# Altium PCB PERfECT-PRO2.PcbDoc
Units mm, origin at the board's own origin, x right, y up, seen from the top; angles counter-clockwise.
Board outline 152.4 x 101.6 mm, 2 copper layers (Top Layer, Bottom Layer); 36 components, 61 nets, 234 pads, 26 vias.
Unrouted connection lines stored in the file: 20.
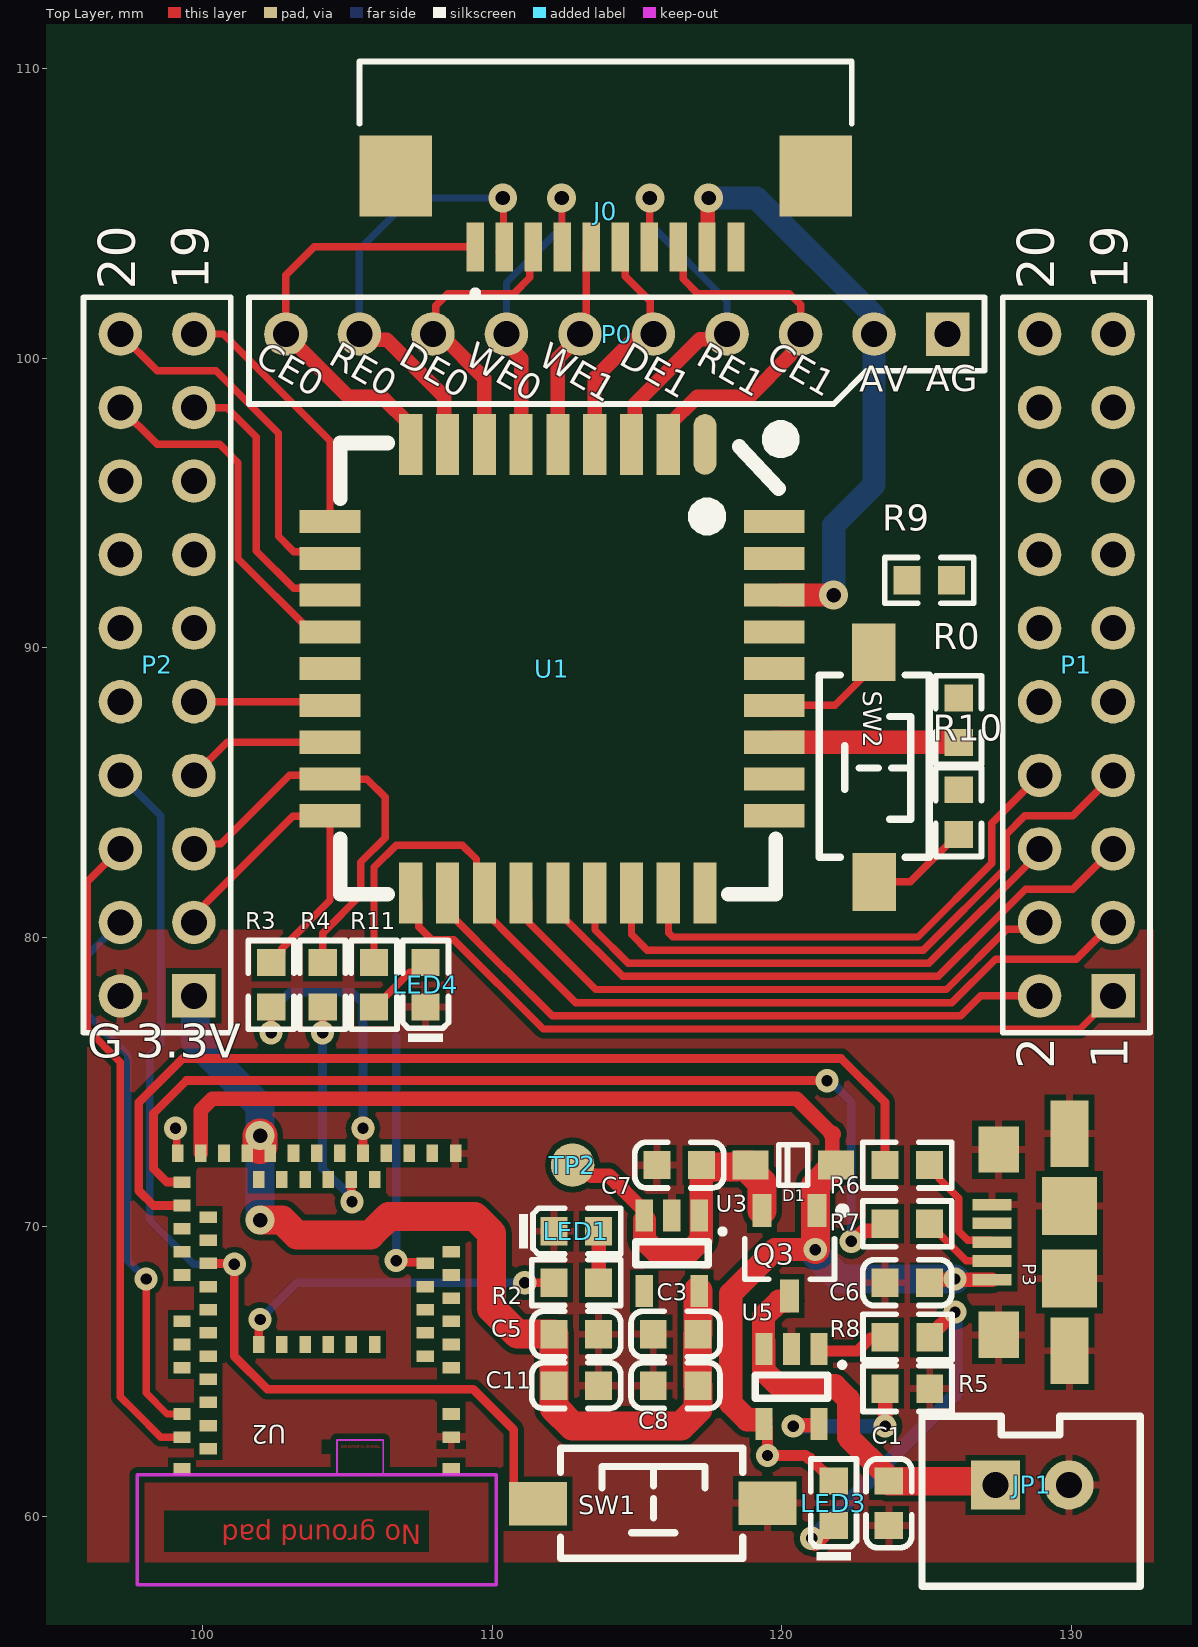
[diagram p0: Top Layer view]
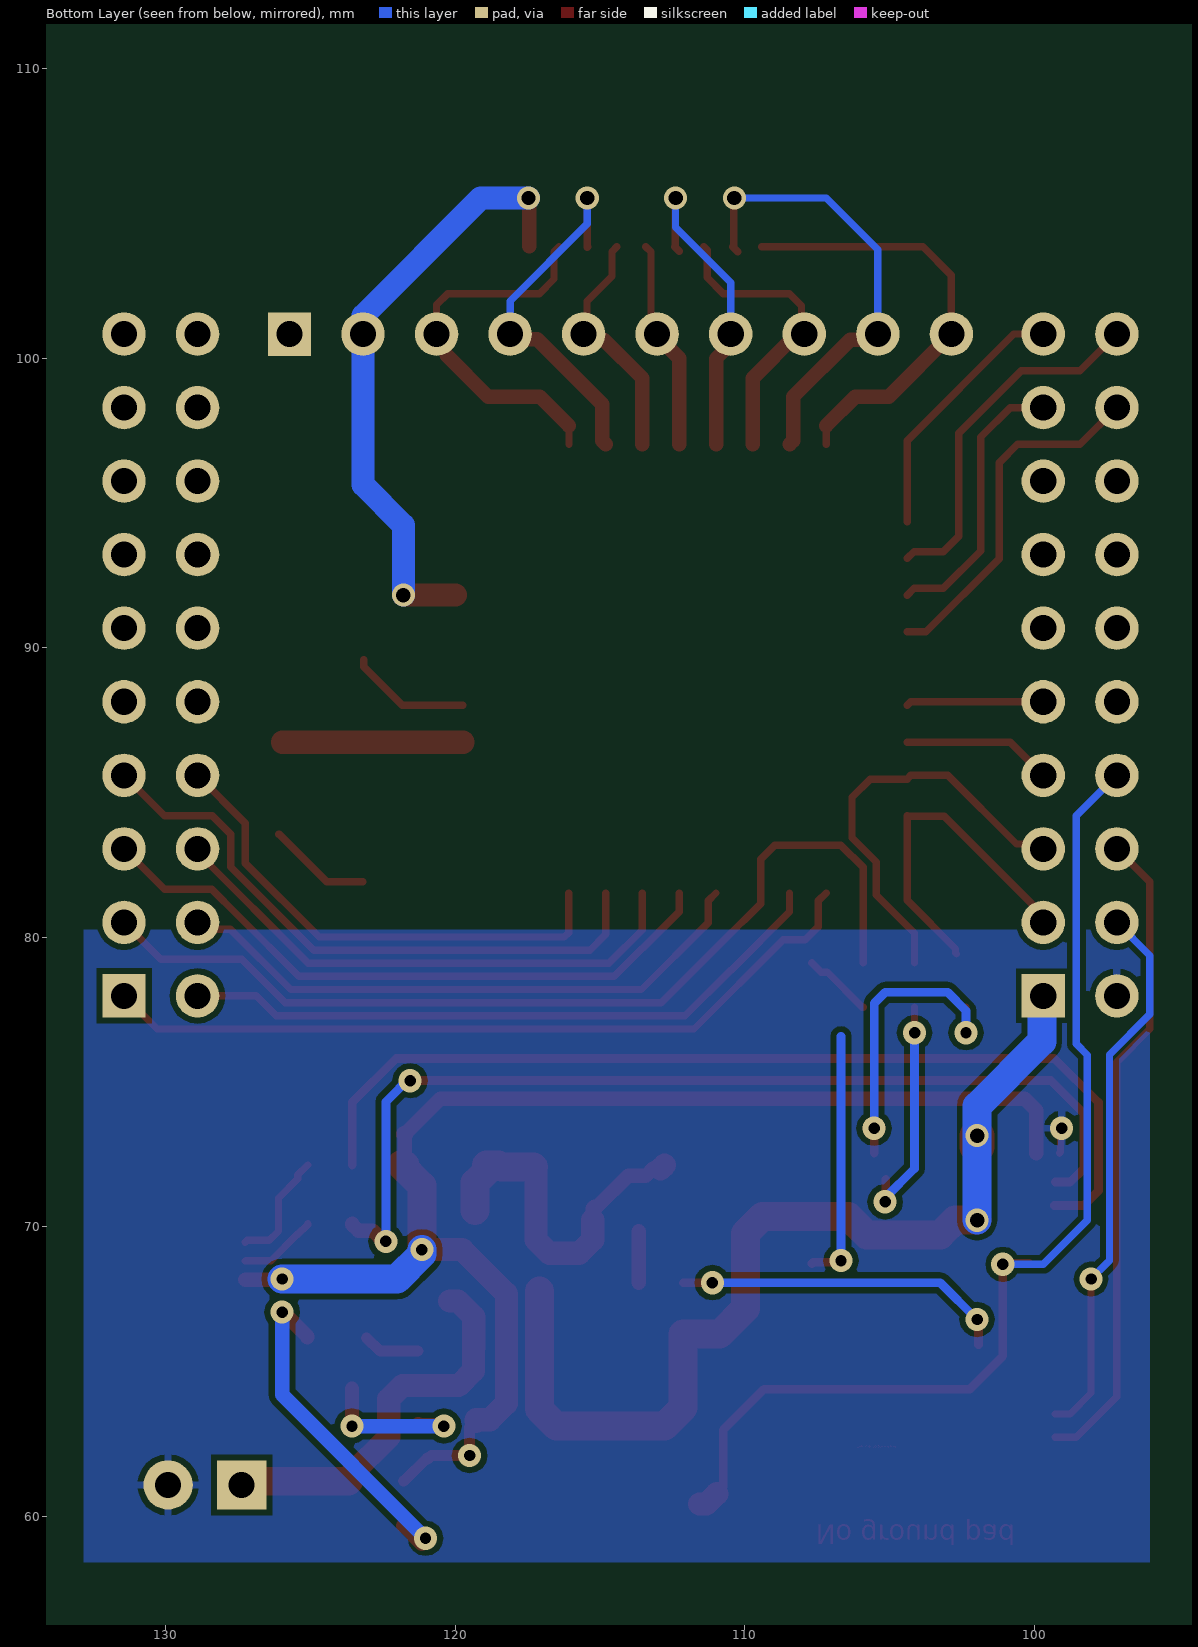
[diagram p1: Bottom Layer view, seen from below]
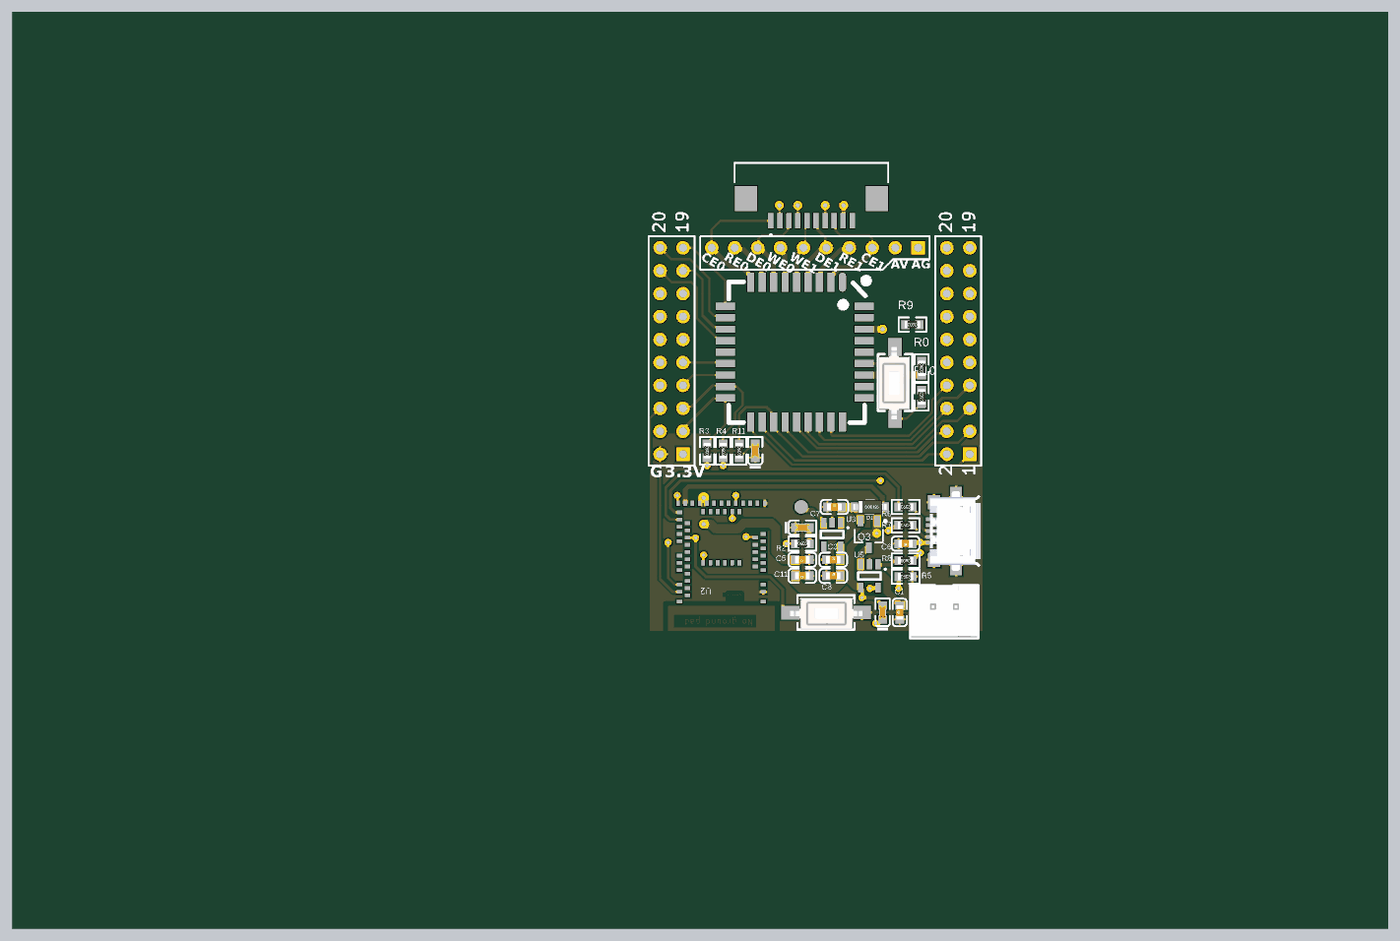
[diagram p2: 3D render of the assembled board from above, using the file's embedded part models]

## Layer stack, top to bottom
Top Solder: solder mask 0.0102, Solder Resist, Dk 3.5
Top Layer: signal copper 0.0356
Dielectric 1: dielectric 0.32, FR-4, Dk 4.8
Bottom Layer: signal copper 0.0356
Bottom Solder: solder mask 0.0102, Solder Resist, Dk 3.5

## Board outline
25.4,25.4 177.8,25.4 177.8,127 25.4,127

## Design rules (kind name [scope] priority, off if disabled: settings)
Clearance Clearance_1 [All] p1: gap=0.2 ignorepadtopadclearanceinfootprint=TRUE
ComponentClearance ComponentClearance_1 [All] p1: gap=0.254 collisioncheckmode=3 verticalgap=0.254 showdistances=FALSE
ComponentClearance [All] p2: gap=0 collisioncheckmode=3 verticalgap=2540 showdistances=TRUE
PolygonConnect [All] p1: connectstyle=Relief reliefconductorwidth=0.254 reliefentries=4 polygonreliefangle="90 Angle" airgapwidth=0.2
RoutingVias [All] p1: holewidth=0.711 width=1.27 viastyle="Through Hole" minholewidth=0.711 minwidth=1.27 maxholewidth=0.711 maxwidth=1.27
SolderMaskExpansion [All] p1: expansion=0.102 istentingtop=FALSE
Width [All] p1: maxlimit=1.2 minlimit=0.254 preferedwidth=0.254
29 further rules are at their usual default settings.

## Components (designator, comment, footprint, x,y, rotation, side; value= is the part's Value field where it differs from the comment)
C1 "10uF" LC-0603_C 123.698,60.452 r90 top
C3 "100nF" LC-0603_C 116.332,66.294 r0 top
C5 "10uF" LC-0603_C 112.903,66.294 r180 top
C6 "10uF" LC-0603_C 124.333,68.072 r180 top
C7 "10uF" LC-0603_C 116.459,72.136 r0 top
C8 "10uF" LC-0603_C 116.332,64.516 r0 top
C11 "100nF" LC-0603_C 112.903,64.516 r180 top
D1 "MBR120" LC-SOD-123 120.396,72.136 r0 top
J0 "FFC3B07-10-T" GCT_FFC3B07-10-T 113.919,106.299 r180 top
JP1 "HDR-1X2" XH2.54-LI-2P 128.651,61.087 r0 top
LED1 "Green" LC-0603_LED_S1 112.903,69.85 r0 top
LED3 "Green" 0603_LED_S1 121.793,60.452 r90 top
LED4 "Green" LC-0603_LED_S1 107.696,78.359 r90 top
P0 "Header 10" HDR1X10 125.73,100.838 r180 top
P1 "JTAG" HDR2X10 131.445,77.978 r90 top
P2 "Header 10X2" HDR2X10 99.695,77.978 r90 top
P3 "Micro USB" 1981584-1 128.599,69.471 r90 top
Q3 "DMG2305" LC-SOT-23-3L 120.269,69.088 r90 top
R0 "0Ω" LC-0603_R 126.111,87.503 r270 top
R2 "1K" LC-0603_R 112.903,68.072 r0 top
R3 "0Ω" 0603_R 102.362,78.359 r270 top
R4 "0Ω" 0603_R 104.14,78.359 r270 top
R5 "4.7K" LC-0603_R 124.341,64.414 r0 top
R6 "22R" LC-0603_R 124.333,72.136 r0 top
R7 "22R" LC-0603_R 124.333,70.104 r0 top
R8 "1K" 0603_R 124.341,66.192 r180 top
R9 "0Ω" LC-0603_R 125.095,92.329 r180 top
R10 "1K" LC-0603_R 126.111,84.328 r90 top
R11 "1K" LC-0603_R 105.918,78.359 r270 top
SW1 "3x6x5" "TSW SMD-3*6*2.5" 115.57,60.452 r0 top
SW2 "3x6x5" "TSW SMD-3*6*2.5" 123.19,85.852 r270 top
TP2 "TESTPOINTROUND1.5MM" TESTPOINT_ROUND_1.5MM 112.776,72.136 r0 top
U1 "PERfECTcoreV5" PERfECTcore36 117.348,97.028 r270 top
U2 "MDBT50" MDBT50 103.935,65.388 r180 top
U3 "AP2112(3.3V)" SOT23-5 116.205,69.088 r270 top
U5 "MCP73831T-2ACI/OT" SOT23-5 120.335,64.486 r270 top

## Footprints (in the part's own frame and the unit in brackets; to place one, negate y for a bottom-side part, rotate by r counter-clockwise, add the part's x,y. Pads: shape width x height; smd on the part's side, far side on the other; paste and mask are expansions set on the pad)
0603_LED_S1 [mm]
  rect 0.93x0.98 smd: A(0.77,0) K(-0.77,0)
  silkscreen extent -1.98,-0.79 1.54,0.79, body extent -0.8,-0.4 0.8,0.4, height 0.6
0603_R [mm]
  rect 0.93x0.98 smd: 1(-0.77,0) 2(0.77,0)
  silkscreen extent -1.53,-0.79 1.54,0.79, body extent -0.85,-0.4 0.85,0.4, height 0.56
1981584-1 [mm]
  rect 0.4x1.35 smd: 1(-1.3,1.338) 2(-0.65,1.338) 3(0,1.338) 4(0.65,1.338) 5(1.3,1.338)
  rect 2.3x1.3 smd: 6(-3.75,-1.337) 6(3.75,-1.337)
  rect 1.6x1.4 smd: 6(-3.2,1.113) 6(3.2,1.113)
  rect 2x1.9 smd: 6(-1.25,-1.337) 6(1.25,-1.337)
  body extent -4.4,-4.05 4.4,1.55, height 2.75
GCT_FFC3B07-10-T [mm]
  rect 0.6x1.7 smd: 1(4.5,2.45) 2(3.5,2.45) 3(2.5,2.45) 4(1.5,2.45) 5(0.5,2.45) 6(-0.5,2.45) 7(-1.5,2.45) 8(-2.5,2.45) 9(-3.5,2.45) 10(-4.5,2.45)
  rect 2.5x2.8 smd: S1(7.25,0) S2(-7.25,0)
  silkscreen extent -8.5,-3.95 8.5,4.15
HDR1X10 [mm] "Connector; Header; 10 Position"
  rect 1.5x1.5 hole 0.9: 1(0,0)
  round 1.5 hole 0.9: 2(2.54,0) 3(5.08,0) 4(7.62,0) 5(10.16,0) 6(12.7,0) 7(15.24,0) 8(17.78,0) 9(20.32,0) 10(22.86,0)
  silkscreen extent -1.27,-1.27 24.13,2.41
HDR2X10 [mm]
  rect 1.5x1.5 hole 0.9: 1(0,0)
  round 1.5 hole 0.9: 2(0,2.54) 3(2.54,0) 4(2.54,2.54) 5(5.08,0) 6(5.08,2.54) 7(7.62,0) 8(7.62,2.54) 9(10.16,0) 10(10.16,2.54) 11(12.7,0) 12(12.7,2.54) 13(15.24,0) 14(15.24,2.54) 15(17.78,0) 16(17.78,2.54) 17(20.32,0) 18(20.32,2.54) 19(22.86,0) 20(22.86,2.54)
  silkscreen extent -1.27,-1.27 24.13,3.81
LC-0603_C [mm]
  rect 0.93x0.98 smd: 1(-0.77,0) 2(0.77,0)
  silkscreen extent -1.53,-0.79 1.54,0.79, body extent -0.8,-0.4 0.8,0.4, height 0.3
LC-0603_LED_S1 [mm]
  rect 0.93x0.98 smd: A(0.77,0) K(-0.77,0)
  silkscreen extent -1.98,-0.79 1.54,0.79, body extent -0.8,-0.4 0.8,0.4, height 0.6
LC-0603_R [mm]
  rect 0.93x0.98 smd: 1(-0.77,0) 2(0.77,0)
  silkscreen extent -1.53,-0.79 1.54,0.79, body extent -0.85,-0.4 0.85,0.4, height 0.56
LC-SOD-123 [mm]
  rect 1.25x1 smd: 1(1.475,0) 2(-1.475,0)
  silkscreen extent -0.5,-0.7 0.5,0.7, body extent -1.85,-0.77 1.85,0.78, height 1.35
LC-SOT-23-3L [mm] "http://www.aosmd.com/res/packaging_information/SOT-23-3L.pdf"
  rect 1.15x0.65 smd: 1(1.475,-0.95) 2(1.475,0.95) 3(-1.475,0)
  silkscreen extent -0.9,-1.95 1.6,1.55, body extent -0.9,-1.55 0.9,1.55, height 1.25
MDBT50 [mil] "MDBT50"
  rect 23.62x15.75 smd: 1(-183.07,147.64) 2(-183.07,104.33) 3(-183.07,72.83) 4(-183.07,9.84) 5(-147.64,-5.91) 6(-183.07,-21.65) 7(-147.64,-37.4) 8(-183.07,-53.15) 9(-147.64,-68.9) 10(-183.07,-84.65) 11(-147.64,-100.39) 12(-183.07,-116.14) 13(-147.64,-131.89) 14(-183.07,-147.64) 34(183.07,-242.13) 35(183.07,-210.63) 36(147.64,-194.88) 37(183.07,-179.13) 38(147.64,-163.39) 39(183.07,-147.64) 40(147.64,-131.89) 41(183.07,-116.14) 42(147.64,-100.39) 43(147.64,-68.9) 44(183.07,-53.15) 45(147.64,-37.4) 46(183.07,-21.65) 47(147.64,-5.91) 48(183.07,9.84) 49(147.64,25.59) 50(147.64,57.09) 51(183.07,72.83) 52(147.64,88.58) 53(183.07,104.33) 54(147.64,120.08) 55(183.07,147.64)
  rect 15.75x23.62 smd: 15(-188.98,-281.5) 16(-157.48,-281.5) 17(-125.98,-281.5) 18(-94.49,-281.5) 19(-78.74,-246.06) 20(-62.99,-281.5) 21(-47.24,-246.06) 22(-31.5,-281.5) 23(-15.75,-246.06) 24(0,-281.5) 25(15.75,-246.06) 26(31.5,-281.5) 27(47.24,-246.06) 28(62.99,-281.5) 29(78.74,-246.06) 30(94.49,-281.5) 31(125.98,-281.5) 32(157.48,-281.5) 33(188.98,-281.5) 56(-78.74,-21.65) 57(-47.24,-21.65) 58(-15.75,-21.65) 59(15.75,-21.65) 60(47.24,-21.65) 61(78.74,-21.65)
  Top Layer keep-out lines w2.36: -27.56,155.51 -27.56,108.27 -90.55,108.27 -90.55,155.51
  Top Layer keep-out lines w5: 244.09,305.12 244.09,155.51 -27.56,155.51 -90.55,155.51 -244.09,155.51 -244.09,305.12 244.09,305.12
  body extent -247,-293 247,308, height 150
PERfECTcore36 [mm]
  oval 2.1x0.8 smd: 1(0,0)
  rect 2.1x0.8 smd: 2(0,-1.27) 3(0,-2.54) 4(0,-3.81) 5(0,-5.08) 6(0,-6.35) 7(0,-7.62) 8(0,-8.89) 9(0,-10.16) 19(15.494,-10.16) 20(15.494,-8.89) 21(15.494,-7.62) 22(15.494,-6.35) 23(15.494,-5.08) 24(15.494,-3.81) 25(15.494,-2.54) 26(15.494,-1.27) 27(15.494,0)
  rect 0.8x2.1 smd: 10(2.667,-12.954) 11(3.937,-12.954) 12(5.207,-12.954) 13(6.477,-12.954) 14(7.747,-12.954) 15(9.017,-12.954) 16(10.287,-12.954) 17(11.557,-12.954) 18(12.827,-12.954) 28(12.827,2.391) 29(11.557,2.391) 30(10.287,2.391) 31(9.017,2.391) 32(7.747,2.391) 33(6.477,2.391) 34(5.207,2.391) 35(3.937,2.391) 36(2.667,2.391)
  silkscreen extent -0.82,-12.6 15.54,3.26, body extent 0.13,-12.68 15.13,2.32, height 0.51
SOT23-5 [mm]
  rect 1.1x0.6 smd: 1(-1.3,0.95) 2(-1.3,0) 3(-1.3,-0.95) 4(1.3,-0.95) 5(1.3,0.95)
  silkscreen extent -0.8,-1.25 0.4,1.8, body extent -0.6,-1.15 0.6,1.25, height 0.95
TESTPOINT_ROUND_1.5MM [mm] "TESTPOINT_ROUND_1.5MM"
  rrect100% 1.5x1.5 smd paste+0: P$1(0,0)
  body extent -0.76,-0.76 0.76,0.76, height 1.27
"TSW SMD-3*6*2.5" [mm] "3*6*2.5mm"
  rect 2x1.5 smd: 1(-3.996,-0.02) 2(3.937,0)
  silkscreen extent -3.21,-1.9 3.09,1.9, body extent -4,-1.88 4,1.62, height 2.59
XH2.54-LI-2P [mm] "接插件，2P"
  rect 1.7x1.7 hole 0.9: 1(-1.27,0)
  round 1.7 hole 0.9: 2(1.27,0)
  silkscreen extent -3.81,-3.51 3.74,2.37, body extent -3.77,-3.3 3.77,2.4, height 7.05

## Part data
C1 C3 C5 C6 C7 C8 C11: library part C, "无极性贴片电容", BOM名称=无极性贴片电容, 学习资源=www.ooocke.com, 版权归属=源创客
D1: library part DIODE-SCHOTTKYSOD-123, DeviceName=SOD-123, DeviceSetName=DIODE-SCHOTTKY, GateName_1=G$1, LibraryName=microbuilder, SymbolName_1=DIODE-SCHOTTKY
J0: "10 Position FFC, FPC Connector Contacts, Bottom 0.039 (1.00mm) Surface Mount, Right Angle", Package=Package, Availability=Warning, BuyPart=https://www.snapeda.com/parts/FFC3B07-10-T/Global%20Connector%20Technology/view-part/4223038/?ref=eda, DigiKey-Purchase-URL=https://snapeda.com/shop?store=DigiKey&id=4223038, MF="Global Connector Technology", MP=FFC3B07-10-T, Price=None, SnapEDA_Link=https://www.snapeda.com/parts/FFC3B07-10-T/Global%20Connector%20Technology/view-part/4223038/?ref=snap
JP1: library part "Header 2", "2P接插件", BOM名称=2P接插件, 学习资源=www.ooocke.com, 版权归属=源创客
LED1 LED3 LED4: library part LED-SMD, "贴片LED", BOM名称=贴片LED, 学习资源=www.ooocke.com, 版权归属=源创客
P0: "Header, 10-Pin", LatestRevisionDate=17-Jul-2002, LatestRevisionNote="Re-released for DXP Platform.", Publisher="Altium Limited"
P1: library part "Header 10X2", "Header, 10-Pin, Dual row", LatestRevisionDate=17-Jul-2002, LatestRevisionNote="Re-released for DXP Platform.", Publisher="Altium Limited"
P2: "Header, 10-Pin, Dual row", LatestRevisionDate=17-Jul-2002, LatestRevisionNote="Re-released for DXP Platform.", Publisher="Altium Limited"
P3: library part 1981584-1, "CONN RCPT MICRO USB TYPE AB", Manufacturer="REG CON", PartNumber=C21377, Vendor=LCSC
Q3: library part MOSFET-P, "P-Channel Mosfet   LEGEND   VDS: Voltage Drain-Source ID: Drain Current RDS(ON): Drain-Source On-State Resistance VGS(TH): Gate-Source Threshold Voltage CISS: Drain-Source Input Capacitance    SOT-23   Name	VDS	ID	RDS(ON)	VGS(TH)	CISS	Order Number	   IRLML5103	30V	760mA	600 mOhm	--	75pF @ 25V	Digikey: IRLML5103PBFCT-ND	   IRLML6401	12V	4.3A	50 mOhm	950mV @ 250碌A	830pF @ 10V	Digikey: IRLML6401PBFTR-ND	   NTR0202PL	20V	400mA	800 mOhm	2.3V @ 250uA	70pF @ 5V	Digikey: NTR0202PLT1GOSTR-ND	   NTR4101PT1G	20V	1.8A	85 mOhm	1.2V @ 250uA	675pF @ 10V	Digikey: NTR4101PT1GOSCT-ND	   DMP2004K	20V	600mA	900 mOhm	1V @ 250uA	175pF @ 16V	Digikey: DMP2004KDICT-ND	   PMV65XP	20V	3.9A	76 mOhm	950mV @ 1mA	725pF @ 20V	Digikey: 568-2358-2-ND	   							   							TO-252   Name	VDS	ID	RDS(ON)	VGS(TH)	CISS	Order Number	   AOD417	30V	25A	34 mOhm	3V @ 250碌A	920pF @ 15V	Digikey: 785-1106-2-ND	PowerPak   Name	VDS	ID	RDS(ON)	VGS(TH)	CISS	Order Number	   AON7401	30V	12A	14 mOhm	3V @ 250碌A	2600pF @ 15V	Digikey: 785-1302-1-ND", D=D, DeviceSetName=MOSFET-P, G=G, GateName_1=G$1, LibraryName=microbuilder, S=S, SymbolName_1=MOSFET-P
R0 R2 R3 R4 R5 R6 R7 R8 R9 R10 R11: library part R, "贴片电阻", BOM名称=贴片电阻, 学习资源=www.ooocke.com, 版权归属=源创客
SW1 SW2: library part "TSW 3x6", "3x6轻触开关", BOM名称=3x6轻触开关, 学习资源=www.ooocke.com, 版权归属=源创客
TP2: "Test Point   Various test points for characterisation and PCB testing    TESTPOINT_SMT - Compact Surface Mount Test Point [Digikey: 5016KTR-ND]", DeviceName=ROUND1.5MM, DeviceSetName=TESTPOINT, GateName_1=G$1, LibraryName=microbuilder, SymbolName_1=TESTPOINT
U1: "This is the 5th version of PERfEC core.https://github.com/WISE-PERfECT/PERfECT"
U2: "Raytac Corporation   MDBT50  Bluetooth Low Energy Module based on Noridc nRF52840    Source:  Raytac datasheet", DeviceSetName=MDBT50, GateName_1=G$1, HS=HS, LibraryName=microbuilder, LS=LS, QSPI=QSPI, QSPI/SCK=QSPI/SCK, SymbolName_1=MDBT50
U3: library part VREG_SOT23-5, "SOT23-5 Fixed Voltage Regulators      Part	Current Out	V Out	V In	V Dropout	胃JA (掳C/W)	TJ (掳C)	Digikey Part No.	     ADP121	  150mA	  3.3V	  3.4-5.5V	  0.09V @ 150mA	  --	  --	  ADP121-AUJZ33R7CT-ND	     ADP121	  150mA	  3.0V	  3.1-5.5V	  0.09V @ 150mA	  --	  --	  ADP121-AUJZ30R7CT-ND	     ADP122	  300mA	  3.3V	  3.4-5.5V	  0.085V @ 300mA	  --	  --	  ADP122AUJZ-3.3-R7CT-ND	     ADP1712	  300mA	  3.3V	  3.5-5.5V	  0.17V @ 300mA	  --	  --	  ADP1712AUJZ-3.3-R7TR-ND	     AP7311 (Low Cost)	  150mA	  3.3V	  3.5-6V	  0.15V @ 150mA	  --	  --	  AP7311-33WG-7DICT-ND	     LD39015M18R	  150mA	  1.8V	  1.9V-5.5V	  0.08V @ 100mA	  --	  --	  497-6977-1-ND	     LP2985A-33DBVR	  150mA	  3.3V	  3.3-16V	  0.28V @ 150mA	  206	  150	  296-18479-1-ND	     MCP1824T-3302E/OT	  300mA	  3.3V	  3.5V-6V	  0.2V @ 300mA	  --	  --	  MCP1824T-3302E/OTCT-ND	     MIC5205-2.5YM5 TR	  150mA	  2.5V	  2.7-16V	  0.165V @ 150mA	  --	  --	  576-1257-2-ND	     MIC5205-3.0YM5 TR	  150mA	  3.0V	  3.2V-16V	  0.165V @ 150mA	  --	  --	  576-1258-2-ND	     MIC5205-3.3YM5 TR	  150mA	  3.3V	  3.5V-16V	  0.165V @ 150mA	  --	  --	  576-1259-2-ND	     TPS780330220	  150mA	  3.3V+2.2V	  3.6-5.5V	  250mV Max	  --	  --	  296-23332-1-ND	     TDA3663/N1,135	  100mA	  3.3V	  3.5-45V	  0.18V @ 50mA	  --	  --	  568-5343-1-ND	     	  	  	  	  	  	  	  	     	  	  	  	  	  	  	  	   Max operating temp can be calculated using 胃JA, TJ (max junction temperature), and power in watts.  Set the \"Maximum Ambient Temperature\" until it reaches TJ (\"Max Junction Temperature\"), which is the absolute limit for safe use of the regulator: Heat Sink Temperature Calculator   For example, With 12V source into a 3.3V LP2985 and a 30mA load, we are dissipating (12V-3.3V) * 0.03A = 0.261W.  With a 胃JA of 206 掳C/W, a TJ of 150掳C, and 261mW we can safely use the chip without a heat sink up to 75掳C (=147.1掳C Junction Temperature).", DeviceSetName=VREG_SOT23-5, GateName_1=G$1, LibraryName=microbuilder, SymbolName_1=VREG_SOT23-5
U5: library part MCP73831/2, "MCP73831/2 LIPO Charger    VDD: 3.75 - 6V  Temp -40 - 85掳C  Programmable Charge Rate: 15-500mA       NOTE: STAT is a tri-state logic output on the MCP73831 and an open-drain output on the MCP73832.   SOT23-5 with 4.2V output and tri-state logic on STAT = MCP73831T-2ACI/OT", Temp=Temp:, 3.75-6V=3.75-6V, -40-85掳C=-40-85掳C, DeviceSetName=MCP73831/2, GateName_1=G$1, LibraryName=microbuilder, LIPOCharger="LIPO Charger", MCP73831/2=MCP73831/2, SymbolName_1=MCP73831/2, VDD=VDD:

## Via types
v1: diameter 0.8/0.8 (per signal layer), hole 0.394, Top Layer to Bottom Layer, 19 vias
v2: diameter 1/0.8 (per signal layer), hole 0.5, Top Layer to Bottom Layer, 7 vias

## Nets (pads, with @x,y where several pads share a name; then routed paths per layer and width w, separated by ;. In a path a pad name is that pad's centre, name@x,y a point inside that pad or via, vN(x,y) a via of type N, cw(c..) or ccw(c..) an arc to the next point about the centre after c; other vN are vias at no path point)
3V3: C3.2 C5.2 C8.2 C11.2 P2.1 R0.1 U2.28 U2.30 U3.5 | length 35
  Top Layer w1: v2(101.981,70.231) 102.743,70.231 103.251,69.723 105.791,69.723 106.426,70.358 109.396,70.358 109.982,69.772 109.982,67.183 110.871,66.294 C5.2 C11.2 112.133,63.762 112.776,63.119 116.516,63.119 117.102,63.705 C8.2 117.094,64.524 117.094,66.286 C3.2 U3.5@117.102,67.788
  Top Layer w1.2: v2@101.981,72.771 v2(101.981,73.152)
  Bottom Layer w1: P2.1 99.744,77.929 99.744,76.405 101.981,74.168 v2(101.981,70.231)
AGND: J0.10 J0.S1 J0.S2 P0.1 R9.2 U1.1 U1.35 U1.36
B+: C1.2 JP1.1 Q3.3 U5.3 | length 13.6
  Top Layer w0.8: U5.3@119.365,65.806 119.365,66.894 119.909,67.438 Q3.3@120.194,67.438 ; U5.3@119.38,66.04 119.38,65.024 119.888,64.516 121.832,64.516 122.301,64.047 122.301,62.738 123.608,61.431 123.608,61.287 C1.2@123.681,61.214
  Top Layer w1: C1.2 123.706,61.214 127.254,61.214 JP1.1
BLE_RST: P2.8 SW1.1 U2.40 | length 37.6
  Top Layer w0.3: U2.40 v1@101.092,68.738 ; v1(101.092,68.707) 101.092,65.532 102.235,64.389 109.347,64.389 110.744,62.992 110.744,61.032 110.83,60.946 SW1.1@111.139,60.946
  Top Layer w0.8: SW1.1@110.974,60.782 111.324,60.432 SW1.1
  Bottom Layer w0.254: P2.8 98.552,84.201 98.552,76.32 98.171,75.939 98.171,70.231 99.695,68.707 v1(101.092,68.707)
BLE_SWCLK: P2.6 U2.53 | length 22.6
  Top Layer w0.254: P2.6 96.012,81.915 96.012,76.835 97.155,75.692 97.155,64.135 97.663,63.627 98.552,62.738 U2.53
BLE_SWDIO: P2.4 U2.51 | length 19.1
  Top Layer w0.254: v1(98.044,68.199) 98.044,64.262 98.768,63.538 U2.51
  Bottom Layer w0.254: P2.4 96.012,79.375 96.012,77.343 97.409,75.946 97.409,68.834 97.483,68.76 v1(98.044,68.199)
D0/AIN2: R3.2 U2.20 | length 10.4
  Top Layer w0.254: v1(102.362,76.708) R3.2
  Top Layer w0.3: U2.20@105.537,72.54 v1(105.537,73.406)
  Bottom Layer w0.3: v1(102.362,76.708) 102.362,77.47 102.997,78.105 105.156,78.105 105.537,77.724 v1(105.537,73.406)
D1/AIN3: R4.2 U2.21 | length 8
  Top Layer w0.254: v1(104.14,76.708) R4.2
  Top Layer w0.3: v1@105.135,70.772 U2.21
  Bottom Layer w0.3: v1(104.14,76.708) 104.14,72.017 105.156,71.001 v1(105.156,70.866)
D2/AIN4: U2.9
D3/AIN5: P2.12 U2.13 | length 8.8
  Top Layer w0.3: v1(106.68,68.834) 106.735,68.779 107.644,68.779 U2.13
  Bottom Layer w0.3: v1(106.68,68.834) 106.68,76.581
D4/AIN6: U2.11
D10/AIN7: U2.14
D16/AIN1: U2.10
D19/SCL: U2.49
D20/SDA: U2.48
D+: R6.1 U2.35 | length 34
  Top Layer w0.3: U2.35@99.314,70.739 98.298,70.739 97.79,71.247 97.79,74.295 99.314,75.819 122.047,75.819 123.563,74.303 R6.1
D-: R7.1 U2.34 | length 34.3
  Top Layer w0.3: U2.34 99.275,71.548 98.759,71.548 98.298,72.009 98.298,73.914 99.441,75.057 121.554,75.057 v1(121.564,75.048)
  Top Layer w0.5: v1(122.399,69.498) 122.421,69.52 122.502,69.52 122.847,69.864 123.348,69.864 123.563,70.079 R7.1
  Bottom Layer w0.3: v1@121.539,75.184 122.399,74.324 v1(122.399,69.498)
DGND: C1.1 C3.1 C5.1 C6.2 C7.1 C8.1 C11.1 JP1.2 LED1.K LED4.K P2.2 P2.10 P3.5 P3.6 R5.2 R9.1 R10.2 SW1.2 U1.14 U1.27 U1.28 U1.29 U2.1 U2.2 U2.15 U2.33 U2.55 U3.2 U5.2 | length 0.9
  Top Layer w0.254: v1(99.06,73.406) 99.097,73.369 99.097,72.576 U2.33
LDOIN: C7.2 D1.2 Q3.2 TP2.P$1 U3.1 U3.3 | length 12.2
  Top Layer w0.5: TP2.P$1@112.91,72.002 113.181,72.002 113.417,71.766 114.035,71.766 115.113,70.688 115.205,70.688 115.255,70.638 U3.3
  Top Layer w0.8: TP2.P$1 TP2.P$1@112.91,72.002 ; U3.3@115.255,70.238 115.255,69.557 115.724,69.088 116.752,69.088 117.221,69.557 117.221,70.388 C7.2@117.221,71.882
  Top Layer w1: C7.2@117.303,72.062 118.429,72.062 118.503,72.136 D1.2@118.712,72.136 ; D1.2 D1.2@118.712,72.136 ; Q3.2 119.319,71.529 D1.2@118.712,72.136
NetLED1_1: LED1.A R2.2 | length 1.8
  Top Layer w0.5: R2.2 LED1.A
NetLED3_2: LED3.K R8.1 | length 12.3
  Top Layer w0.5: v1(121.031,59.245) 121.031,59.182 121.158,59.055 121.451,59.348 121.451,59.365 121.768,59.682 LED3.K ; R8.1 125.111,66.217 125.95,67.056 v1(125.984,67.056)
  Bottom Layer w0.5: v1(121.031,59.245) 125.984,64.198 v1(125.984,67.056)
NetLED4_1: LED4.A R11.2 | length 2.4
  Top Layer w0.254: R11.2 105.943,77.589 107.145,78.791 107.358,78.791 LED4.A
NetP3_2: P3.2 R7.2 | length 2.7
  Top Layer w0.254: R7.2 125.103,70.079 125.441,69.741 125.458,69.741 126.367,68.832 127.251,68.832 P3.2
NetP3_3: P3.3 R6.2 | length 4
  Top Layer w0.254: R6.2 125.441,71.798 125.441,71.663 126.111,70.993 126.111,69.85 126.423,69.538 127.195,69.538 P3.3
NetR2_1: R2.1 U2.61 | length 11.6
  Top Layer w0.3: U2.61 v1@101.935,66.756 ; v1(111.125,68.072) R2.1
  Top Layer w0.5: v1@101.935,66.756 v1(101.981,66.802)
  Bottom Layer w0.3: v1(101.981,66.802) 103.251,68.072 v1(111.125,68.072)
NetR5_1: R5.1 U5.5 | length 5.4
  Top Layer w0.5: v1(120.396,63.119) 120.43,63.153 121.251,63.153 U5.5 ; v1(123.571,63.119) R5.1
  Bottom Layer w0.5: v1(120.396,63.119) v1(123.571,63.119)
NetR8_2: R8.2 U5.1 | length 2
  Top Layer w0.381: U5.1@121.285,65.714 122.61,65.714 123.063,66.167
NetR10_1: R10.1 SW2.2 | length 3.6
  Top Layer w0.254: SW2.2 124.443,81.915 126.086,83.558 R10.1
NetSW2_1: SW2.1 U1.31 | length 4.2
  Top Layer w0.254: U1.31 121.837,88.011 123.17,89.344 SW2.1@123.17,89.594
P2: J0.8 P0.3 U1.2 | length 13.4
  Top Layer w0.254: U1.2 U1.2@116.078,97.678 ; J0.8 116.592,103.676 116.592,102.737 117.094,102.235 120.269,102.235 120.65,101.854 120.65,100.501 120.295,100.146 120.295,100.102
  Top Layer w0.5: U1.2@116.078,97.678 117.079,98.679 118.872,98.679 120.295,100.102
P3: J0.7 P0.4 U1.3 | length 13.2
  Top Layer w0.254: J0.7 115.443,103.825 v2(115.443,105.537)
  Top Layer w0.5: U1.3 114.928,97.148 114.928,98.418 117.168,100.658 117.93,100.658 P0.4
  Bottom Layer w0.254: v2(115.443,105.537) 115.443,104.648 118.11,101.981 P0.4
P3.3: R0.2 U1.30 | length 6.4
  Top Layer w0.254: R0.2@125.976,86.741 R0.2@126.111,86.606
  Top Layer w0.8: U1.30 R0.2@125.976,86.741
P4: J0.6 P0.5 U1.4 | length 8.4
  Top Layer w0.254: J0.6@114.423,103.853 114.592,103.684 114.592,102.832 115.455,101.969 115.455,100.953 P0.5
  Top Layer w0.5: U1.4 113.538,99.314 114.871,100.647 115.379,100.647 P0.5
P5: J0.5 P0.6 U1.5 | length 7.3
  Top Layer w0.254: P0.6@113.03,100.763 P0.6 113.246,101.054 113.246,103.676 J0.5
  Top Layer w0.5: U1.5 112.268,100.001 P0.6@113.03,100.763
P6: J0.4 P0.7 U1.6 | length 11.4
  Top Layer w0.254: P0.7@110.49,100.501 P0.7 ; J0.4@112.27,103.7 J0.4 112.407,103.861 112.407,105.525 v2(112.395,105.537)
  Top Layer w0.5: P0.7@110.49,100.501 110.998,99.993 U1.6
  Bottom Layer w0.254: P0.7 110.49,102.616 112.395,104.521 v2(112.395,105.537)
P7: J0.3 P0.8 U1.7 | length 10.5
  Top Layer w0.254: P0.8 108.043,100.931 108.043,101.82 108.458,102.235 110.744,102.235 111.298,102.789 111.298,103.728 J0.3
  Top Layer w0.5: P0.8 108.204,100.838 109.728,99.314 U1.7
P8: J0.2 P0.9 U1.8 | length 16.1
  Top Layer w0.254: J0.2@110.246,103.676 J0.2 110.391,103.877 110.391,105.509 v2(110.363,105.537)
  Top Layer w0.5: P0.9 105.601,100.647 106.363,100.647 108.338,98.672 108.338,97.148 U1.8
  Bottom Layer w0.254: P0.9 105.41,103.759 107.188,105.537 v2(110.363,105.537)
P9: J0.1 P0.10 U1.9 | length 15.3
  Top Layer w0.254: P0.10 102.87,102.87 103.849,103.849 J0.1 ; U1.9 U1.9@107.188,97.678
  Top Layer w0.5: P0.10 105.029,98.679 106.187,98.679 U1.9@107.188,97.678
P10: P2.19 U1.10 | length 9
  Top Layer w0.254: P2.19 100.711,100.838 104.394,97.155 U1.10
P11: P2.20 U1.11 | length 12.5
  Top Layer w0.254: P2.20 98.425,99.568 100.457,99.568 102.616,97.409 102.616,93.853 103.146,93.323 104.162,93.323 U1.11
P12: P2.17 U1.12 | length 9.7
  Top Layer w0.254: P2.17 100.838,98.298 101.854,97.282 101.854,93.345 103.146,92.053 104.162,92.053 U1.12
P13: P2.18 U1.13 | length 12.4
  Top Layer w0.254: P2.18 98.425,97.028 100.584,97.028 101.219,96.393 101.219,93.076 103.744,90.551 U1.13
P19: P1.1 U1.19 | length 27.2
  Top Layer w0.254: U1.19 107.461,81.261 107.461,80.372 107.912,79.921 108.674,79.921 111.76,76.835 130.302,76.835 P1.1
P20: P1.2 U1.20 | length 22.9
  Top Layer w0.254: U1.20 108.458,80.884 110.475,78.867 110.49,78.867 112.068,77.289 126.184,77.289 126.873,77.978 P1.2
P21: P1.3 R11.1 U1.21 | length 33.4
  Top Layer w0.254: R11.1 105.918,82.416 106.687,83.185 108.966,83.185 109.455,82.696 109.455,81.157 110.001,80.611 110.016,80.611 110.271,80.356 110.271,80.349 110.463,80.157 110.47,80.157 112.884,77.743 125.876,77.743 127.381,79.248 130.175,79.248 P1.3
P22: P1.4 U1.22 | length 20.7
  Top Layer w0.254: U1.22 111.271,81.261 111.271,80.499 113.573,78.197 125.688,78.197 127.774,80.283 128.67,80.283 P1.4
P23: P1.5 U1.23 | length 22.6
  Top Layer w0.254: U1.23 112.268,80.884 112.541,80.611 112.549,80.611 114.509,78.651 125.408,78.651 127.527,80.77 128.418,81.661 130.048,81.661 P1.5
P24: P1.6 U1.24 | length 18.8
  Top Layer w0.254: U1.24 113.55,81.522 113.55,80.252 114.697,79.105 125.079,79.105 128.905,82.931 P1.6
P25: P1.7 U1.25 | length 21.5
  Top Layer w0.254: U1.25 114.808,80.103 115.352,79.559 124.891,79.559 127.762,82.43 127.762,83.566 128.397,84.201 130.048,84.201 P1.7
P26: P1.8 U1.26 | length 17.4
  Top Layer w0.254: U1.26 116.09,81.522 116.09,80.162 116.239,80.013 124.703,80.013 127.254,82.564 127.254,83.947 P1.8
P34: J0.9 P0.2 U1.34 | length 21.7
  Top Layer w0.254: J0.9 J0.9@117.447,103.877 ; v2@117.447,105.509 v2(117.475,105.537) ; U1.34 119.866,91.948 U1.34@119.993,91.821 ; P0.2@123.063,100.965 P0.2
  Top Layer w0.5: J0.9@117.447,103.877 v2@117.447,105.509
  Top Layer w0.8: U1.34@119.993,91.821 v2(121.793,91.821)
  Bottom Layer w0.8: v2(117.475,105.537) 119.126,105.537 123.19,101.473 P0.2 123.19,95.631 121.793,94.234 v2(121.793,91.821)
PRX: P2.5 R4.1 U1.17 | length 14.6
  Top Layer w0.254: P2.5 99.86,83.223 100.622,83.223 102.997,85.598 104.267,85.598 U1.17 ; R4.1 104.14,80.137 105.464,81.461 105.464,82.604 106.299,83.439 106.299,84.836 105.676,85.459 U1.17@104.394,85.459
PTX: P2.3 R3.1 U1.18 | length 11
  Top Layer w0.254: 100.107,81.184 103.112,84.189 104.382,84.189 U1.18 104.394,81.28 102.725,79.611 102.725,79.467 R3.1@102.691,79.433
SWCLK: P2.7 U1.16 | length 5.2
  Top Layer w0.254: P2.7 100.838,86.741 U1.16
SWEDIO: P2.9 U1.15 | length 4.8
  Top Layer w0.254: P2.9 104.267,88.138 U1.15
TFT_CS: U2.29
TFT_DC: U2.37
TFT_MOSI: U2.39
TFT_RESET: U2.60
TFT_SCK: U2.36
VBUS: C6.1 D1.1 LED3.A P3.1 Q3.1 U2.32 U5.4 | length 48.4
  Top Layer w0.381: U5.4 119.507,63.064 v1(119.507,62.103) 120.821,62.103 120.948,61.976 120.981,62.009 121.768,61.222 LED3.A
  Top Layer w0.5: U2.32 99.935,74.027 100.33,74.422 120.523,74.422 121.746,73.199 D1.1@121.746,72.136 ; C6.1@125.103,68.171 P3.1
  Top Layer w0.8: U5.4@119.285,63.286 119.285,63.336 118.806,63.336 118.237,63.905 118.237,67.691 119.761,69.215 v1(121.158,69.215)
  Top Layer w1: v1(121.158,69.215) 121.158,71.423 D1.1 D1.1@121.746,72.136
  Bottom Layer w1: v1(121.158,69.215) 121.158,69.056 122.015,68.199 v1(125.984,68.199)
pads on no net: P1.9 P1.10 P1.11 P1.12 P1.13 P1.14 P1.15 P1.16 P1.17 P1.18 P1.19 P1.20 P2.11 P2.13 P2.14 P2.15 P2.16 P3.4 U1.32 U1.33 U2.3 U2.4 U2.5 U2.6 U2.7 U2.8 U2.12 U2.16 U2.17 U2.18 U2.19 U2.22 U2.23 U2.24 U2.25 U2.26 U2.27 U2.31 U2.38 U2.41 U2.42 U2.43 U2.44 U2.45 U2.46 U2.47 U2.50 U2.52 U2.54 U2.56 U2.57 U2.58 U2.59 U3.4

## Polygon pours and split planes (outlines as drawn)
DGND on Bottom Layer "NONET_L-01_P-001" (solid, pour order 0): 132.842,58.42 132.842,80.264 96.012,80.264 96.012,58.42
DGND on Top Layer "NONET_L-01_P-001" (solid, pour order 1): 132.842,58.42 132.842,80.264 96.012,80.264 96.012,58.42

## Silkscreen, mask and mechanical layers (free items; w line width, h text height)
Top Overlay:
  text "CE0" at 101.607,99.58 h1.52 r330
  text "RE0" at 104.147,99.58 h1.52 r330
  text "DE0" at 106.56,99.58 h1.52 r330
  text "WE0" at 108.846,99.58 h1.52 r330
  text "WE1" at 111.379,99.568 h1.52 r330
  text "DE1" at 114.173,99.568 h1.52 r330
  text "RE1" at 116.84,99.568 h1.52 r330
  text "CE1" at 119.26,99.58 h1.52 r330
  text "AG" at 124.968,98.565 h1.52
  text "AV" at 122.682,98.552 h1.52

## Dimensions
95.885,102.108 to 132.842,63.5 on Mechanical 1
95.123,107.823 to 99.187,58.293 on Mechanical 1

## Text inside footprints (layer, text, board x,y; h text height)
P1: Top Overlay "20" at 129.413,102.362 h1.27 r90; Top Overlay "19" at 131.953,102.362 h1.27 r90; Top Overlay "1" at 131.953,75.438 h1.27 r90; Top Overlay "2" at 129.413,75.438 h1.27 r90
P2: Top Overlay "20" at 97.663,102.362 h1.27 r90; Top Overlay "19" at 100.203,102.362 h1.27 r90; Top Overlay "3.3V" at 97.663,75.438 h2; Top Overlay "G" at 96.012,75.438 h2
U2: Top Layer "Toplayer no ground pad" at 106.125,62.438 h0.09 r180; Top Layer "No ground pad" at 107.545,59.708 h0.68 r180